# Altium PCB Smart_Battery_Charge_Measurement_IC_PCB.PcbDoc
Units mm, origin at the board's own origin, x right, y up, seen from the top; angles counter-clockwise.
Board outline 128 x 77 mm, 2 copper layers (Top Layer, Bottom Layer); 29 components, 24 nets, 116 pads, 4 vias.
Unrouted connection lines stored in the file: 4.
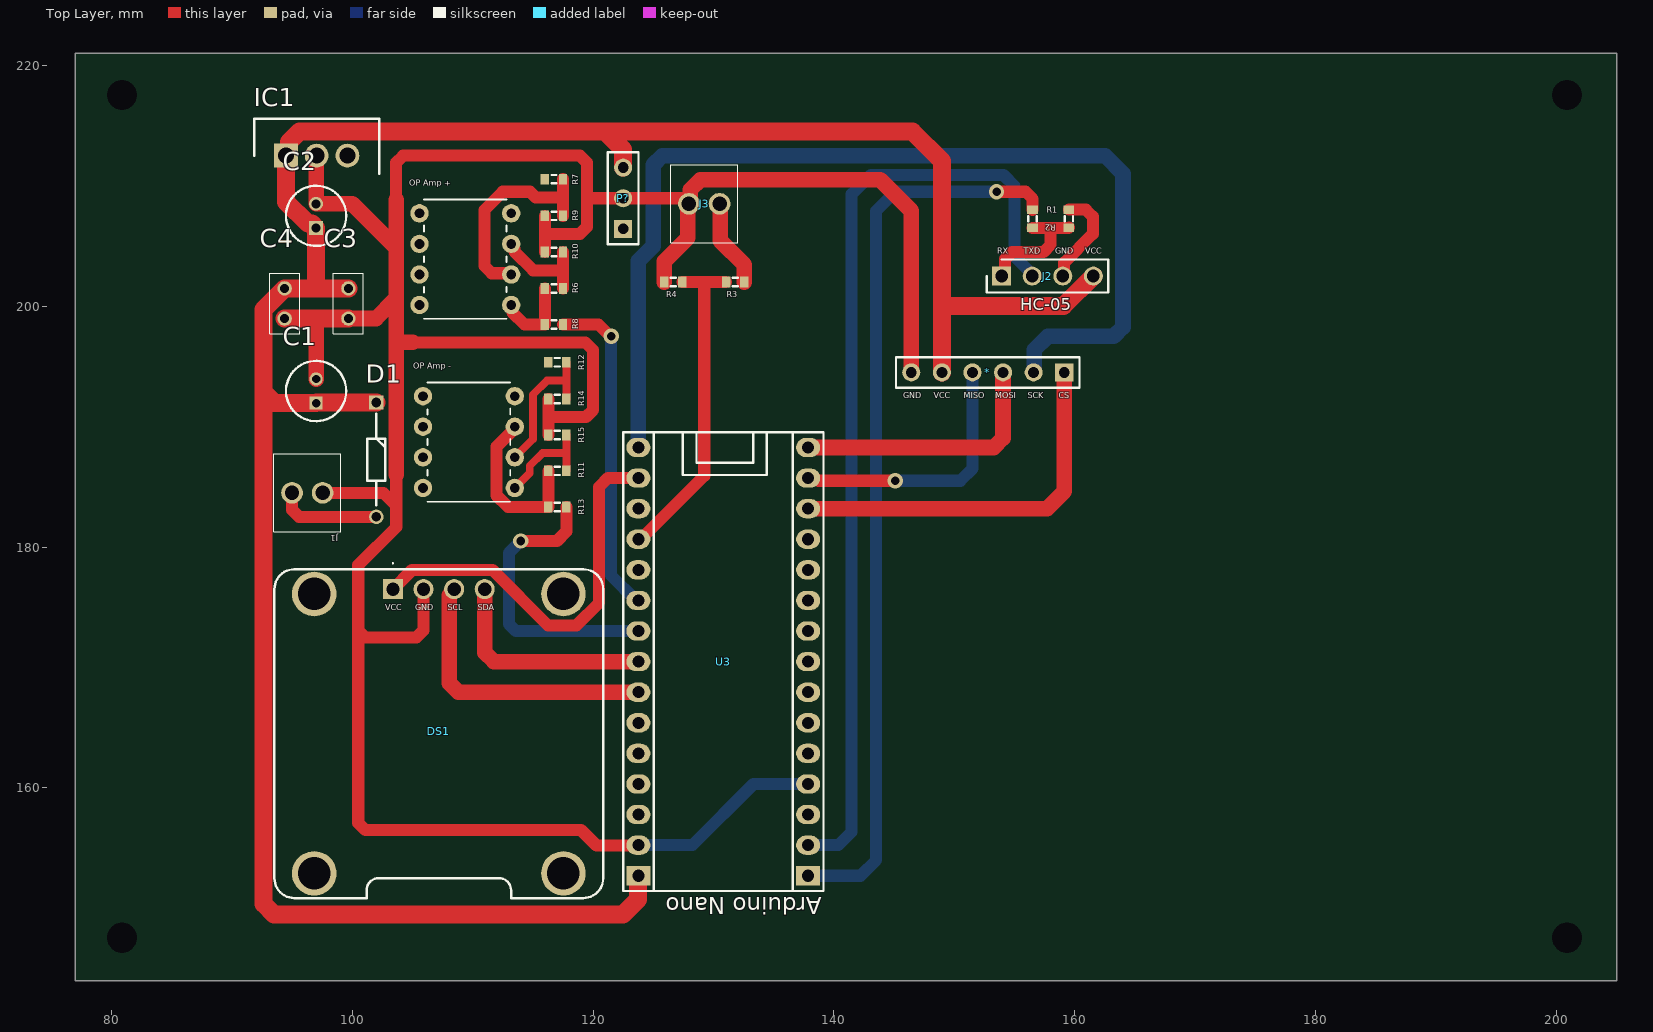
[diagram p0: Top Layer view]
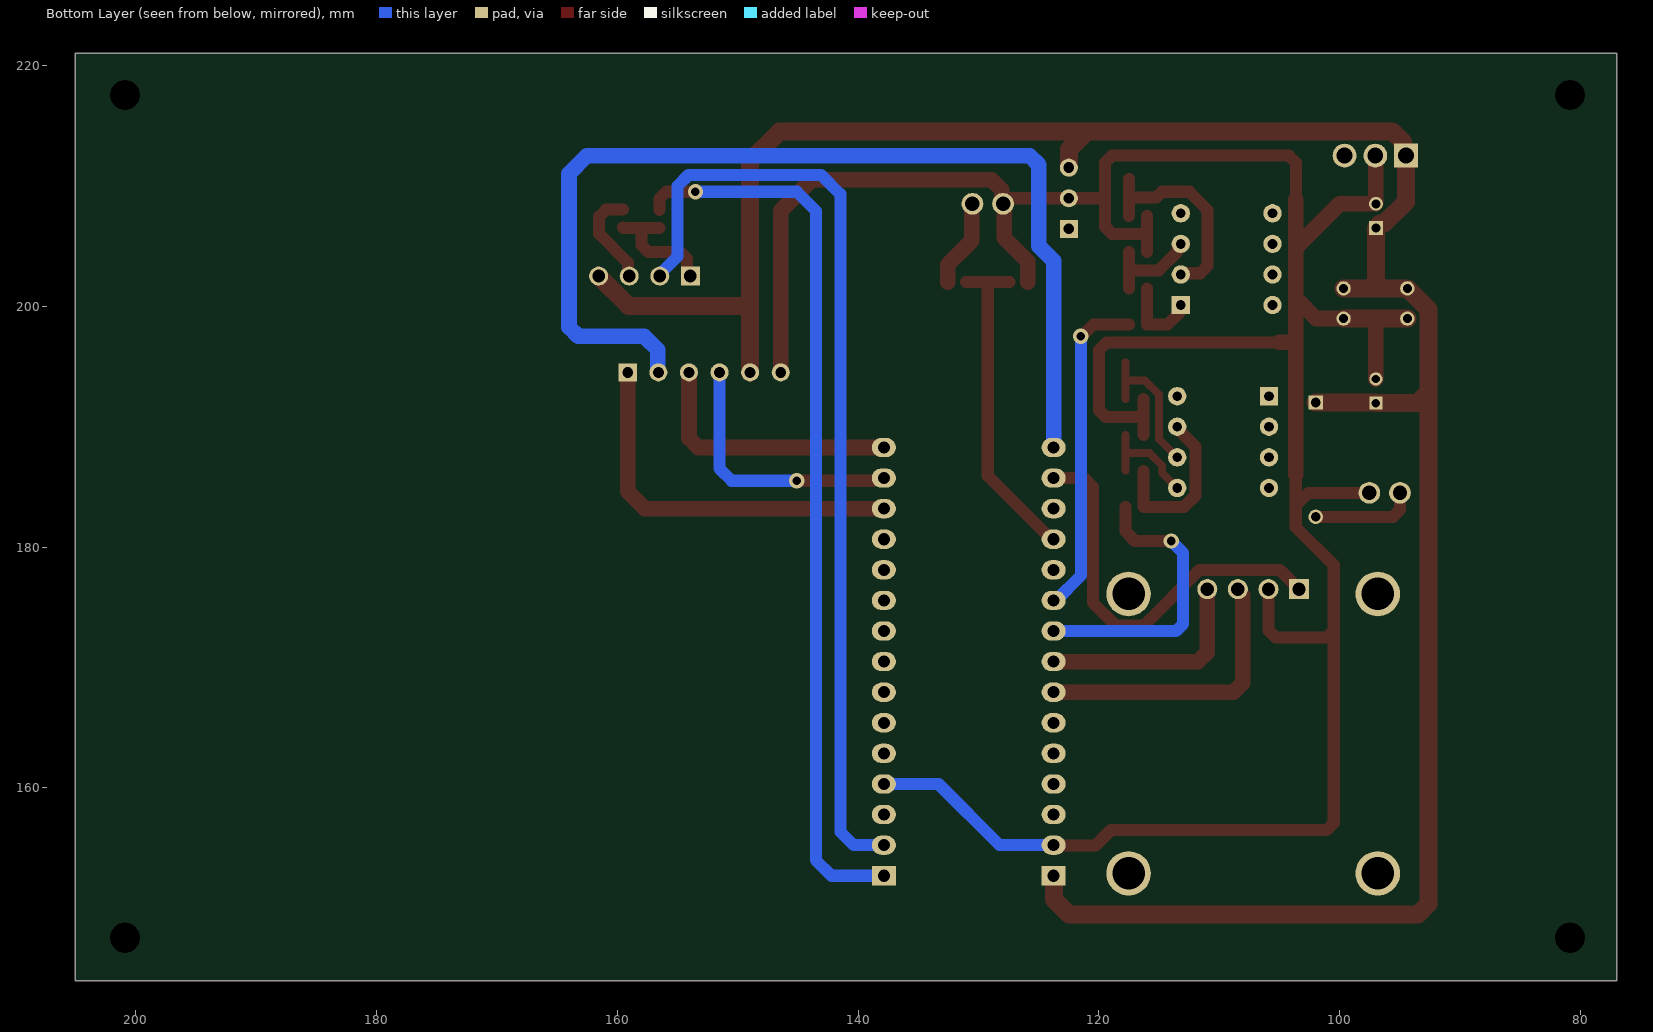
[diagram p1: Bottom Layer view, seen from below]

## Layer stack, top to bottom
Top Solder: solder mask 0.0102, Solder Resist, Dk 3.5
Top Layer: signal copper 0.0356
Dielectric 1: dielectric 0.32, FR-4, Dk 4.8
Bottom Layer: signal copper 0.0356
Bottom Solder: solder mask 0.0102, Solder Resist, Dk 3.5

## Board outline
77,144 205,144 205,221 77,221

## Design rules (kind name [scope] priority, off if disabled: settings)
Clearance [All] p1: gap=0.254 ignorepadtopadclearanceinfootprint=FALSE except(0: Arc-Hole Track-Hole SMDPad-Hole THPad-Hole Via-Hole Fill-Hole Poly-Hole Region-Hole Text-Hole)
DiffPairsRouting [All] p1: maxlimit=1 minlimit=0.5 mostfreqgap=0.75 toplayer_minwidth=0.5 toplayer_maxwidth=1 toplayer_prefwidth=0.75 bottomlayer_minwidth=0.5 bottomlayer_maxwidth=1 bottomlayer_prefwidth=0.75 maxuncoupledlength=12.7
PolygonConnect [All] p1: connectstyle=Relief reliefconductorwidth=0.254 reliefentries=4 polygonreliefangle="90 Angle" airgapwidth=0.254
RoutingVias [All] p1: holewidth=0.711 width=1.27 viastyle="Through Hole" minholewidth=0.711 minwidth=1.27 maxholewidth=0.711 maxwidth=1.27
SolderMaskExpansion [All] p1: expansion=0.102 istentingtop=FALSE
Width [All] p1: maxlimit=1.5 minlimit=0.625 preferedwidth=1.25 minimp=50.000000 maximp=50.000000 favimp=50.000000
29 further rules are at their usual default settings.

## Components (designator, comment, footprint, x,y, rotation, side; value= is the part's Value field where it differs from the comment)
* "SD CARD MODULE" "SD CARD MODULE" 152.82,178.8 r0 top
C1 "0.22uF" CAPPRD200W52D500H1250 97,191.952 r90 top
C2 "10uF" CAPPRD200W55D500H1250 97,206.5 r90 top
C3 "0.1uF" RDE5C1H100J0P1H03B 99.685,201.471 r270 top
C4 "0.1uF" RDE5C1H100J0P1H03B 94.387,201.471 r270 top
D1 "SD103A-TR" DIOAD950W60L350D150 102,192 r270 top
DS1 "MDOB128064WV-YBI" MDOB128064WVYBI 103.38,176.5 r0 top
IC1 "L7805CV" TO255P460X1020X2008-3P 94.5,212.5 r0 top
J1 "1546215-2" 15462152 97.54,184.5 r180 top
J2 "HC-05 Header 1X4" "HC-05 Header 1X4" 153.92,202.5 r0 top
J3 "1546215-2" 15462152 130.5,208.5 r180 top
"OP Amp +" "LM358N/NOPB" N08E 113.2,200.091 r180 top (schematic designator U4)
"OP Amp -" "LM358N/NOPB" N08E 105.878,192.526 r0 top (schematic designator U2)
P? "Header 3" HDR1X3 122.5,206.42 r90 top
R1 "Res3" J1-0603 156.5,207.25 r90 top value=10k
R2 "Res3" J1-0603 159.5,207.266 r270 top value=18k
R3 "Res3" J1-0603 131.8,202 r0 top value=10k
R4 "Res3" J1-0603 126.66,202 r0 top value=1k
R6 "Res3" J1-0603 116.75,201.455 r0 top value=73K
R7 "Res3" J1-0603 116.75,210.543 r180 top value=6
R8 "Res3" J1-0603 116.75,198.488 r180 top value=1k
R9 "Res3" J1-0603 116.75,207.5 r0 top value=0.22
R10 "Res3" J1-0603 116.75,204.502 r0 top value=1k
R11 "Res3" J1-0603 117.032,186.328 r0 top value=73k
R12 "Res3" J1-0603 117.032,195.342 r180 top value=6
R13 "Res3" J1-0603 117.032,183.331 r180 top value=1k
R14 "Res3" J1-0603 117.032,192.301 r0 top value=0.22
R15 "Res3" J1-0603 117.032,189.293 r0 top value=1k
U3 "Arduino Nano" "Ardunio Nano R3" 131,171.5 r270 top

## Footprints (in the part's own frame and the unit in brackets; to place one, negate y for a bottom-side part, rotate by r counter-clockwise, add the part's x,y. Pads: shape width x height; smd on the part's side, far side on the other; paste and mask are expansions set on the pad)
15462152 [mm]
  round 1.8 hole 1.2: 1(0,0) 2(2.54,0)
  silkscreen extent -1.5,-3.25 4.04,3.25, body extent -1.46,-3.25 4,3.25, height 9.91
"Ardunio Nano R3" [mm]
  rect 1.6x2 hole 1: 1(18.796,6.858) 30(18.796,-7.239)
  oval 1.6x2 hole 1: 2(16.256,6.858) 3(13.716,6.858) 4(11.176,6.858) 5(8.636,6.858) 6(6.096,6.858) 7(3.556,6.858) 8(1.016,6.858) 9(-1.524,6.858) 10(-4.064,6.858) 11(-6.604,6.858) 12(-9.144,6.858) 13(-11.684,6.858) 14(-14.224,6.858) 15(-16.764,6.858) 16(-16.764,-7.239) 17(-14.224,-7.239) 18(-11.684,-7.239) 19(-9.144,-7.239) 20(-6.604,-7.239) 21(-4.064,-7.239) 22(-1.524,-7.239) 23(1.016,-7.239) 24(3.556,-7.239) 25(6.096,-7.239) 26(8.636,-7.239) 27(11.176,-7.239) 28(13.716,-7.239) 29(16.256,-7.239)
  silkscreen extent -18.03,-8.51 20.07,8.13
CAPPRD200W52D500H1250 [mm]
  rect 1.1x1.1 hole 0.7: 1(0,0)
  round 1.1 hole 0.7: 2(2,0)
  silkscreen extent -1.5,-2.5 3.5,2.5, body extent -1.74,-2.75 3.75,2.75, height 12.5
CAPPRD200W55D500H1250 [mm]
  rect 1.15x1.15 hole 0.75: 1(0,0)
  round 1.15 hole 0.75: 2(2,0)
  silkscreen extent -1.5,-2.5 3.5,2.5, body extent -1.74,-2.75 3.75,2.75, height 12.5
DIOAD950W60L350D150 [mm]
  rect 1.2x1.2 hole 0.8: 1(0,0)
  round 1.2 hole 0.8: 2(9.5,0)
  silkscreen extent 0.95,-0.75 8.55,0.75, body extent -0.3,-0.84 9.8,0.84, height 1.7
"HC-05 Header 1X4" [mm]
  rect 1.575x1.575 hole 1.05: 1(0,0)
  round 1.575 hole 1.05: 2(2.54,0) 3(5.08,0) 4(7.62,0)
  silkscreen extent -1.24,-1.37 8.86,1.37, body extent -1.15,-1.19 8.75,1.17, height 10.66
HDR1X3 [mm] "Connector; Header; 3 Position"
  rect 1.5x1.5 hole 0.9: 1(0,0)
  round 1.5 hole 0.9: 2(2.54,0) 3(5.08,0)
  silkscreen extent -1.27,-1.27 6.35,1.27
J1-0603 [mm] "Chip Resistor, Body 1.6x0.8mm, IPC High Density"
  rect 0.7x0.9 smd: 1(-0.75,0) 2(0.75,0)
  silkscreen extent -0.2,-0.35 0.2,0.35, body extent -0.85,-0.48 0.85,0.48, height 0.9
MDOB128064WVYBI [mm]
  rect 1.665x1.665 hole 1.11: 1(0,0)
  round 1.665 hole 1.11: 2(2.54,0) 3(5.08,0) 4(7.62,0)
  round 3.7 hole 2.7: MH1(-6.54,-0.4) MH2(14.16,-0.4) MH3(-6.54,-23.6) MH4(14.16,-23.6)
  silkscreen extent -9.84,-25.65 17.46,2.2
N08E [mil]
  round 60 / inner round 60 / far side rect 60x60 hole 32 paste-30 mask+0: 1(0,0)
  round 60 hole 32 paste-30 mask+0: 2(0,-100) 3(0,-200) 4(0,-300) 5(300,-300) 6(300,-200) 7(300,-100) 8(300,0)
  silkscreen extent 15,-345 285,45, body extent -5,-340 315,40, height 215
RDE5C1H100J0P1H03B [mm]
  round 1.2 hole 0.75: 1(0,0) 2(2.5,0)
  silkscreen extent -1.25,-1.25 3.75,1.25, body extent -2.67,-1.25 5.17,1.25, height 6.75
"SD CARD MODULE" [mm]
  rect 1.5x1.5 hole 0.9: 1(6.3,15.7)
  round 1.5 hole 0.9: 2(3.76,15.7) 3(1.22,15.7) 4(-1.32,15.7) 5(-3.86,15.7) 6(-6.4,15.7)
  silkscreen extent -7.67,14.43 7.57,16.97
TO255P460X1020X2008-3P [mm]
  rect 1.98x1.98 hole 1.32: 1(0,0)
  round 1.98 hole 1.32: 2(2.55,0) 3(5.1,0)
  silkscreen extent -2.65,-1.53 7.75,3.07, body extent -2.55,-1.53 7.65,3.07, height 19.22

## Part data
C1: library part 860010772002, "Capacitor Polarised", Manufacturer_Name="Wurth Elektronik", Mouser Part Number=710-860010772002, Datasheet Link=https://componentsearchengine.com/Datasheets/1/860010772002.pdf, Height=12.5mm, Manufacturer_Part_Number=860010772002, Mouser Price/Stock=https://www.mouser.co.uk/ProductDetail/Wurth-Elektronik/860010772002?qs=0KOYDY2FL2%2FXueoM4QQtRg%3D%3D
C2: library part EEU-FR1H100, "Capacitor Polarised", Manufacturer_Name=Panasonic, Mouser Part Number=667-EEU-FR1H100, Datasheet Link=http://industrial.panasonic.com/cdbs/www-data/pdf/RDF0000/ABA0000C1259.pdf, Height=12.5mm, Manufacturer_Part_Number=EEU-FR1H100, Mouser Price/Stock=https://www.mouser.co.uk/ProductDetail/Panasonic/EEU-FR1H100?qs=tfZGHB2PWd1NAbdNSgjToQ%3D%3D
C3 C4: library part RDER71E104K0P1H03B, "Capacitor", Manufacturer_Name="Murata Electronics", Mouser Part Number=81-RDER71E104K0P1H3B, Arrow Part Number=RDER71E104K0P1H03B, Arrow Price/Stock=https://www.arrow.com/en/products/rder71e104k0p1h03b/murata-manufacturing?region=nac, Datasheet Link=https://psearch.en.murata.com/capacitor/product/RDER71E104K0P1H03B.html, Height=6mm, Manufacturer_Part_Number=RDER71E104K0P1H03B, Mouser Price/Stock=https://www.mouser.co.uk/ProductDetail/Murata-Electronics/RDER71E104K0P1H03B?qs=hNud%2FORuBR1RYUkyJwpo2Q%3D%3D
D1: "Schottky Diode", Manufacturer_Name=Vishay, Mouser Part Number=625-SD103A, Arrow Part Number=SD103A-TR, Arrow Price/Stock=https://www.arrow.com/en/products/sd103a-tr/vishay?region=nac, Datasheet Link=https://componentsearchengine.com/Datasheets/5/SD103A-TR.pdf, Manufacturer_Part_Number=SD103A-TR, Mouser Price/Stock=https://www.mouser.co.uk/ProductDetail/Vishay-Semiconductors/SD103A-TR?qs=RwahMLkpD2urFD%2FzZdGOBw%3D%3D
DS1: "Display", Manufacturer_Name=MIDAS, Datasheet Link=https://www.midasdisplays.com/getattachment/fada0345-3815-4682-b4f7-385dd3f5cb09/specification, Height=4.52mm, Manufacturer_Part_Number=MDOB128064WV-YBI
IC1: "Integrated Circuit", Manufacturer_Name=STMicroelectronics, Mouser Part Number=511-L7805CV, Arrow Part Number=L7805CV, Arrow Price/Stock=https://www.arrow.com/en/products/l7805cv/stmicroelectronics?region=europe, Datasheet Link=http://www.st.com/web/en/resource/technical/document/datasheet/CD00000444.pdf, Height=4.6mm, Manufacturer_Part_Number=L7805CV, Mouser Price/Stock=https://www.mouser.co.uk/ProductDetail/STMicroelectronics/L7805CV?qs=9NrABl3fj%2FqplZAHiYUxWg%3D%3D
J1 J3: "Connector", Manufacturer_Name="TE Connectivity", Mouser Part Number=571-1546215-2, Arrow Part Number=1546215-2, Arrow Price/Stock=https://www.arrow.com/en/products/1546215-2/te-connectivity?region=nac, Datasheet Link=https://www.te.com/commerce/DocumentDelivery/DDEController?Action=srchrtrv&DocNm=1546215&DocType=Customer+Drawing&DocLang=English, Height=10.3mm, Manufacturer_Part_Number=1546215-2, Mouser Price/Stock=https://www.mouser.co.uk/ProductDetail/TE-Connectivity/1546215-2?qs=Lxq28tKK6BPmJFoAOY7Ljw%3D%3D
J2: "Bluetooth Module Header", Arrow Part Number=0022032041, Manufacturer_Name=Molex, Mouser Part Number=N/A, Arrow Price/Stock=https://www.arrow.com/en/products/0022032041/molex?region=europe, Datasheet Link=http://www.molex.com/pdm_docs/sd/022032041_sd.pdf, Height=11.55mm, Manufacturer_Part_Number=0022032041, Mouser Price/Stock=https://www.mouser.co.uk/ProductDetail/Molex/0022032041?qs=PBcRNPEHKsrt5pJfEqGMHQ%3D%3D
"OP Amp +" "OP Amp -": "OP AMP", Manufacturer=NationalSemiconductor, Mfr_Name="Texas Instruments", PartNumber=LM358AN, Characteristics=LM358ANLowPowerDualOpAmp, ComponentLink1DescBC=LM358Datasheet, ComponentLink1URL=http//wwwnationalcom/ds/LM/LM358pdf, ComponentLink2DescA4=LM358WebPage, ComponentLink2URL=http//wwwnationalcom/pf/LM/LM358html, ComponentLink3DescAC=N08EPackageWebPage, ComponentLink3URL=http//wwwnationalcom/packaging/folders/n08ehtml, CompType=OpAmpIC, LatestRevisionDate=2009-03-16, LatestRevisionNote=MassUpdate, PackageDescription=8LeadPlasticDIP, PackageReference=N08E_L, Published=2009-03-16, Publisher=NationalSemiconductor, RoHS=O, SymbolVersion=2008-07-09, TaMax_C=700, TaMin_C=00, Version=B1608
P?: "Header, 3-Pin", LatestRevisionDate=17-Jul-2002, LatestRevisionNote="Re-released for DXP Platform.", Publisher="Altium Limited"
R1 R2 R3 R4 R6 R7 R8 R9 R10 R11 R12 R13 R14 R15: "Resistor", LatestRevisionDate=29-May-2009, LatestRevisionNote="IPC-7351 Footprint Added.", PackageDescription="Chip Resistor", PackageReference=J1-0603, Published=8-Jun-2000, Publisher="Altium Limited"
U3: library part "Ardunio Nano R3"

## Free pads (board coordinates)
  oval 0x1.524 hole 2.513: 4(80.875,217.525) 5(200.875,217.525) 6(200.875,147.55) 7(80.875,147.55)

## Via types
v1: diameter 1.27, hole 0.711, Top Layer to Bottom Layer, 4 vias

## Nets (pads, with @x,y where several pads share a name; then routed paths per layer and width w, separated by ;. In a path a pad name is that pad's centre, name@x,y a point inside that pad or via, vN(x,y) a via of type N, cw(c..) or ccw(c..) an arc to the next point about the centre after c; other vN are vias at no path point)
+3.3: DS1.1 U3.17 | length 33.6
  Top Layer w1: DS1.1 104.967,178.087 111.657,178.087 116.248,173.496 118.619,173.496 120.5,175.377 120.5,185 121.224,185.724 U3.17
+5: *.5 C1.1 C2.1 C3.1 C4.1 D1.1 IC1.1 IC1.3 J2.4 P?.3 U3.27 U3.30 | length 204.7
  Top Layer w1.5: C3.1 97.036,201.471 ; D1.1 97.048,192 C1.1 93.548,191.952 92.633,192.867 ; P?.3 122.5,213 121,214.5 ; U3.30 123.742,152.685 123.742,150.742 122.5,149.5 93.511,149.5 92.633,150.379 92.633,192.867 ; *.5 148.96,200 ; J2.4 159.04,200 148.96,200 ; 92.633,192.867 92.633,199.717 C4.1 97.036,201.471 ; 97.036,201.471 97,201.506 C2.1 96.654,206.846 96.315,206.846 94.5,208.661 IC1.1 94.74,212.74 94.74,213.621 95.619,214.5 121,214.5 ; 121,214.5 146.5,214.5 148.96,212.04 148.96,200
A0: R3.1 R4.2 U3.19 | length 27.4
  Top Layer w1: U3.19 123.961,180.644 129.23,185.913 129.23,202 ; R4.2 129.23,202 ; R3.1 129.23,202
A1: P?.1 U3.20
A2: R8.1 U3.21 | length 27.4
  Top Layer w1: R8.1 120.439,198.488 121.427,197.5 v1(121.5,197.5)
  Bottom Layer w1: v1(121.5,197.5) 121.5,177.625 123.561,175.564 U3.21
A3: R13.1 U3.22 | length 24.5
  Top Layer w1: v1(114,180.5) 117,180.5 117.782,181.282 R13.1
  Bottom Layer w1: v1(114,180.5) 113,179.5 113,173.61 113.586,173.024 U3.22
BT_RX: J2.1 R1.1 R2.2 | length 10.2
  Top Layer w1: J2.1 154.202,202.782 154.202,203.914 154.788,204.5 157.406,204.5 157.992,205.086 157.992,206.5 ; R1.1 157.992,206.5 ; R2.2 159.484,206.5 157.992,206.5
BT_TXD: J2.2 U3.2 | length 79.7
  Bottom Layer w1: U3.2 140.358,155.244 141.468,156.354 141.468,209.296 143.061,210.889 154.075,210.889 155,209.964 155,204.116 156.46,202.656 J2.2
CS: *.1 U3.13 | length 31.7
  Top Layer w1.3: U3.13 157.684,183.184 159.12,184.62 *.1
GND: *.6 C1.2 C2.2 C3.2 C4.2 DS1.2 IC1.2 J1.1 J2.3 J3.2 P?.2 R2.1 R4.1 R9.1 R10.1 R14.1 R15.1 U3.4 U3.29 | length 255
  Top Layer w1: J1.1 102.589,184.5 103.654,183.435 ; 103.637,208.863 103.637,211.914 104.223,212.5 118.914,212.5 119.5,211.914 119.5,209 ; 103.654,186 103.654,183.435 ; 103.654,189 103.694,188.96 ; 105,197 119.348,197 120,196.348 120,191.383 119.414,190.797 116.282,190.797 ; DS1.2 105.92,173.086 105.334,172.5 101.086,172.5 100.5,173.086 ; R10.1 116,206.001 ; R9.1 116,206.001 ; R15.1 116.282,190.797 ; R14.1 116.282,190.797 ; U3.29 123.735,155.218 120.282,155.218 119,156.5 101.086,156.5 100.5,157.086 100.5,173.086 ; R4.1 R4.1@126,201.91 ; J3.2 127.744,208.5 127.284,208.96 P?.2 119.54,208.96 119.5,209 ; J2.3 159.11,202.61 159.11,203.61 161.5,206 161.5,207.43 160.914,208.016 R2.1 ; 100.5,173.086 100.5,178.5 103.654,181.654 103.654,183.435 ; 116,206.001 118.914,206.001 119.5,206.587 119.5,209
  Top Layer w1.3: C1.2 97,198.971 ; IC1.2 97,212.45 C2.2 100,208.5 103.654,204.846 ; C3.2 101.971,198.971 103.534,200.534 ; 103.654,186 103.654,189 103.654,197 ; 103.654,208.846 103.654,204.846 ; 105,197 103.654,197 ; R4.1 125.91,203.715 127.864,205.669 127.864,208.404 J3.2 128.056,208.596 128.056,209.642 128.914,210.5 143.84,210.5 146.42,207.92 *.6 ; 103.654,197 103.654,204.846
  Top Layer w1.5: C4.2 97,198.971 C3.2
  Bottom Layer w1: U3.29 128.244,155.244 133.324,160.324 U3.4
MISO: *.4 U3.14 | length 22.1
  Top Layer w1: U3.14 137.973,185.609 138.597,185.609 138.706,185.5 v1@145.024,185.5
  Bottom Layer w1: v1(145.097,185.5) 150.5,185.5 151.5,186.5 *.4
MOSI: *.3 U3.15 | length 22
  Top Layer w1.3: U3.15 153.264,188.264 154.04,189.04 *.3
NAN0_TX: R1.2 U3.1 | length 74.9
  Top Layer w1: v1(153.5,209.5) 155.914,209.5 156.5,208.914 R1.2
  Bottom Layer w1: U3.1 142.204,152.704 143.5,154 143.5,207.914 145.086,209.5 v1(153.5,209.5)
NetR6_1: "OP Amp +.1" R6.1 R8.2 | length 6.7
  Top Layer w1: 113.2,200.091 113.3,199.99 113.3,199.478 114.29,198.488 R8.2 R6.1
NetR6_2: "OP Amp +.3" R6.2 R10.2 | length 8.5
  Top Layer w1: 113.2,205.171 113.2,205.029 113.462,204.767 113.462,204.538 115.021,202.979 117.5,202.979 ; R6.2 117.5,202.979 ; R10.2 117.5,202.979
NetR7_1: "OP Amp +.2" R7.1 R9.2 | length 17.5
  Top Layer w1: 113.2,202.631 113.099,202.731 111.586,202.731 111,203.317 111,208 112.5,209.5 114.761,209.5 115.239,209.022 117.5,209.022 ; R9.2 117.5,209.022 ; R7.1 117.5,209.022
NetR11_1: "OP Amp -.7" R11.1 R13.2 | length 14
  Top Layer w1: 113.498,189.986 113.498,189.845 111.982,188.329 111.982,184.278 112.93,183.331 R13.2 R11.1
NetR11_2: "OP Amp -.5" R11.2 R15.2 | length 8.8
  Top Layer w0.65: 113.498,184.906 114.738,186.146 114.738,186.738 115.811,187.811 117.782,187.811 ; R11.2 117.782,187.811 ; R15.2 117.782,187.811
NetR12_1: "OP Amp -.6" R12.1 R14.2 | length 12.1
  Top Layer w0.65: 113.498,187.446 115,188.948 115,192.638 116.184,193.822 117.782,193.822 ; R14.2 117.782,193.822 ; R12.1 117.782,193.822
SCK: *.2 U3.16 | length 86.7
  Bottom Layer w1.3: U3.16 123.761,203.761 125,205 125,211.738 125.762,212.5 162.5,212.5 164,211 164,198.262 163.238,197.5 157.762,197.5 156.618,196.357 156.618,194.538 *.2
SCL: DS1.3 U3.24 | length 24
  Top Layer w1.3: DS1.3 108.46,176.401 108.056,175.997 108.056,168.706 108.818,167.944 U3.24
SDA: DS1.4 U3.23 | length 18.3
  Top Layer w1.3: DS1.4 111,171.246 111.762,170.484 U3.23
VCC: D1.2 J1.2 | length 8.7
  Top Layer w1: J1.2 95,183.086 95.586,182.5 D1.2
VCC_Divider: J3.1 R3.2 | length 7.3
  Top Layer w1: J3.1 J3.1@130.567,208.433
  Top Layer w1.3: J3.1@130.567,208.433 130.567,205.433 132.55,203.45 R3.2
pads on no net: "OP Amp +.4" "OP Amp +.5" "OP Amp +.6" "OP Amp +.7" "OP Amp +.8" "OP Amp -.1" "OP Amp -.2" "OP Amp -.3" "OP Amp -.4" "OP Amp -.8" DS1.MH1 DS1.MH2 DS1.MH3 DS1.MH4 R7.2 R12.2 U3.3 U3.5 U3.6 U3.7 U3.8 U3.9 U3.10 U3.11 U3.12 U3.18 U3.25 U3.26 U3.28

## Silkscreen, mask and mechanical layers (free items; w line width, h text height)
Mechanical 1:
  circle w0.013: c200.876,217.537 r1.25
  circle w0.013: c200.876,217.537 r2.5
  circle w0.013: c80.876,217.537 r1.25
  circle w0.013: c80.876,217.537 r2.5
  circle w0.013: c80.876,147.537 r1.25
  circle w0.013: c80.876,147.537 r2.5
  circle w0.013: c200.876,147.537 r2.5
  circle w0.013: c200.876,147.537 r1.25
  circle w0.013: c215.626,227.287 r1.25
  circle w0.013: c66.126,227.287 r1.25
  circle w0.013: c215.626,227.287 r3.75
  circle w0.013: c66.126,227.287 r3.75
  circle w0.013: c66.126,137.787 r1.25
  circle w0.013: c215.626,137.787 r1.25
  circle w0.013: c66.126,137.787 r3.75
  circle w0.013: c215.626,137.787 r3.75
  lines w0.013: 60.976,132.637 61.044,132.705 ; 60.976,132.637 60.976,232.437 ; 60.976,132.637 220.776,132.637 ; 60.976,232.437 61.044,232.369 ; 60.976,232.437 220.776,232.437 ; 61.044,132.705 61.751,132.705 ; 61.044,132.705 61.044,133.412 ; 61.044,133.412 63.113,135.481 ; 61.044,133.412 61.412,133.989 ; 61.044,231.662 63.113,229.593 ; 61.044,231.662 61.412,231.085 ; 61.044,231.662 61.044,232.369 ; 61.044,232.369 61.751,232.369 ; 61.412,133.989 62.761,135.338 ; 61.412,133.989 61.412,231.085 ; 61.412,231.085 62.761,229.736 ; 61.751,132.705 63.82,134.774 ; 61.751,132.705 62.328,133.073 ; 61.751,232.369 63.82,230.3 ; 61.751,232.369 62.328,232.001 ; 62.328,133.073 63.676,134.422 ; 62.328,133.073 219.424,133.073 ; 62.328,232.001 63.676,230.652 ; 62.328,232.001 219.424,232.001 ; 62.761,135.338 cw(c66.126,137.787) 63.676,134.422 ; 62.761,135.338 62.799,135.353 63.05,135.456 63.113,135.481 ; 62.761,229.736 ccw(c66.126,227.287) 63.676,230.652 ; 62.761,229.736 62.83,229.708 63.113,229.593 ; 63.113,135.481 ccw(c66.126,137.787) 63.82,134.774 ; 63.113,229.593 cw(c66.126,227.287) 63.82,230.3 ; 63.676,134.422 63.704,134.491 63.82,134.774 ; 63.676,230.652 63.692,230.614 63.795,230.363 63.82,230.3 ; 217.931,134.774 ccw(c215.626,137.787) 218.639,135.481 ; 217.931,134.774 220.001,132.705 ; 217.931,134.774 217.957,134.711 218.06,134.46 218.075,134.422 ; 217.931,230.3 cw(c215.626,227.287) 218.639,229.593 ; 217.931,230.3 220.001,232.369 ; 217.931,230.3 218.047,230.583 218.075,230.652 ; 218.075,134.422 cw(c215.626,137.787) 218.991,135.338 ; 218.075,134.422 219.424,133.073 ; 218.075,230.652 ccw(c215.626,227.287) 218.991,229.736 ; 218.075,230.652 219.424,232.001 ; 218.639,135.481 220.708,133.412 ; 218.639,135.481 218.922,135.366 218.991,135.338 ; 218.639,229.593 220.708,231.662 ; 218.639,229.593 218.701,229.618 218.952,229.721 218.991,229.736 ; 218.991,135.338 220.34,133.989 ; 218.991,229.736 220.34,231.085 ; 219.424,133.073 220.001,132.705 ; 219.424,232.001 220.001,232.369 ; 220.001,132.705 220.708,132.705 ; 220.001,232.369 220.708,232.369 ; 220.34,133.989 220.34,231.085 ; 220.34,133.989 220.708,133.412 ; 220.34,231.085 220.708,231.662 ; 220.708,132.705 220.708,133.412 ; 220.708,132.705 220.776,132.637 ; 220.708,231.662 220.708,232.369 ; 220.708,232.369 220.776,232.437 ; 220.776,132.637 220.776,232.437 ; 57.376,132.537 ccw(c60.876,132.537) 60.876,129.037 220.876,129.037 ccw(c220.876,132.537) 224.376,132.537 224.376,232.537 ccw(c220.876,232.537) 220.876,236.037 60.876,236.037 ccw(c60.876,232.537) 57.376,232.537 57.376,132.537
  text "6" at 284.167,290.668 h1.85
  text "7" at 334.167,290.668 h1.85
Mechanical 3:
  region: 73.166,213.981 72.404,213.981 72.785,217.537
  region: 72.785,147.537 72.404,151.093 73.166,151.093
  region: 200.876,140.892 197.32,140.511 197.32,141.273
  region: 84.432,140.511 80.876,140.892 84.432,141.273
  region: 64.968,242.081 61.412,242.462 64.968,242.843
  region: 220.34,242.462 216.784,242.081 216.784,242.843
  region: 234.384,133.073 234.003,136.629 234.765,136.629
  region: 234.765,228.445 234.003,228.445 234.384,232.001
  region: 69.682,118.656 66.126,119.037 69.682,119.418
  region: 215.626,119.037 212.07,118.656 212.07,119.418
  region: 47.757,223.731 46.995,223.731 47.376,227.287
  region: 47.376,137.787 46.995,141.343 47.757,141.343
  region: 40.257,232.481 39.495,232.481 39.876,236.037
  region: 39.876,129.037 39.495,132.593 40.257,132.593
  region: 224.376,113.037 220.82,112.656 220.82,113.418
  region: 60.932,112.656 57.376,113.037 60.932,113.418
  lines w0.013: 5,48.5 10,48.5 ; 38.876,129.037 59.876,129.037 ; 38.876,236.037 59.876,236.037 ; 39.876,129.037 39.876,236.037 ; 46.376,137.787 65.126,137.787 ; 46.376,227.287 65.126,227.287 ; 47.376,137.787 47.376,227.287 ; 57.376,112.037 57.376,131.537 ; 57.376,113.037 224.376,113.037 ; 61.412,232.085 61.412,243.462 ; 61.412,242.462 220.34,242.462 ; 66.126,118.037 66.126,136.787 ; 66.126,119.037 215.626,119.037 ; 71.785,147.537 79.876,147.537 ; 71.785,217.537 79.876,217.537 ; 72.785,147.537 72.785,217.537 ; 80.876,139.892 80.876,146.537 ; 80.876,140.892 200.876,140.892 ; 200.05,216.599 201.702,218.475 ; 200.876,139.892 200.876,146.537 ; 215.626,118.037 215.626,136.787 ; 220.34,232.085 220.34,243.462 ; 220.424,133.073 235.384,133.073 ; 220.424,232.001 235.384,232.001 ; 224.376,112.037 224.376,131.537 ; 234.384,133.073 234.384,232.001 ; 310,287 310,292 ; 360,287 360,292 ; 402,10 227.8,10 10,10 10,287 410,287 410,60.159 ; 410,98.5 415,98.5 ; 5,5 414.595,5 414.595,292 5,292 5,5
  text "158,9" at 133.777,246.973 h3.5
  text "70" at 68.273,179.664 h3.5 r90
  text "107" at 35.364,178.658 h3.5 r90
  text "89,5" at 42.864,178.011 h3.5 r90
  text "98,9" at 229.872,178.011 h3.5 r90
  text "149,5" at 135.057,123.549 h3.5
  text "167" at 136.997,117.549 h3.5

## Text inside footprints (layer, text, board x,y; h text height)
*: Top Overlay "CS" at 158.674,192.354 h0.5; Top Overlay "SCK" at 156.074,192.354 h0.5; Top Overlay "MOSI" at 153.374,192.354 h0.5; Top Overlay "MISO" at 150.774,192.354 h0.5; Top Overlay "VCC" at 148.274,192.354 h0.5; Top Overlay "GND" at 145.774,192.354 h0.5
DS1: Top Overlay "SDA" at 110.434,174.754 h0.5; Top Overlay "SCL" at 107.934,174.754 h0.5; Top Overlay "GND" at 105.234,174.754 h0.5; Top Overlay "VCC" at 102.734,174.754 h0.5
J2: Top Overlay "VCC" at 160.874,204.354 h0.5; Top Overlay "GND" at 158.374,204.354 h0.5; Top Overlay "TXD" at 155.774,204.354 h0.5; Top Overlay "RX" at 153.574,204.354 h0.5; Top Overlay "HC-05" at 155.474,199.654 h1
"OP Amp +": Mechanical 13 "*" at 112.755,200.726 h1.27 r180
"OP Amp -": Mechanical 13 "*" at 106.323,191.891 h1.27